# Altium PCB PCB.PcbDoc
Units mil, origin at the board's own origin, x right, y up, seen from the top; angles counter-clockwise.
Board outline 1270 x 865 mil, 2 copper layers (Top Layer, Bottom Layer); 11 components, 8 nets, 28 pads, 109 vias.
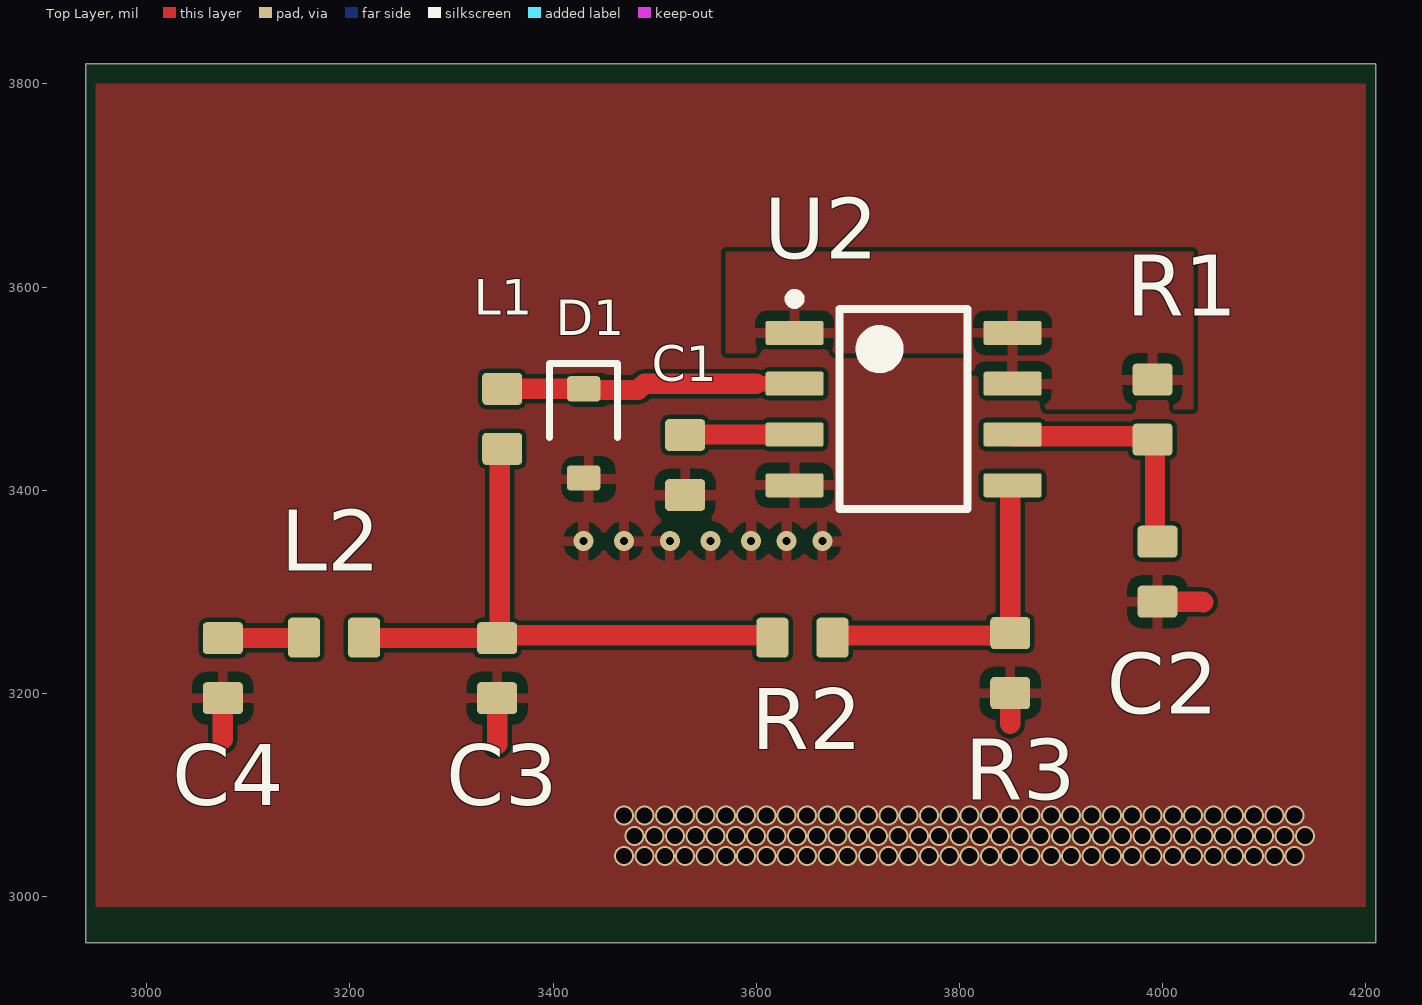
[diagram p0: Top Layer view]
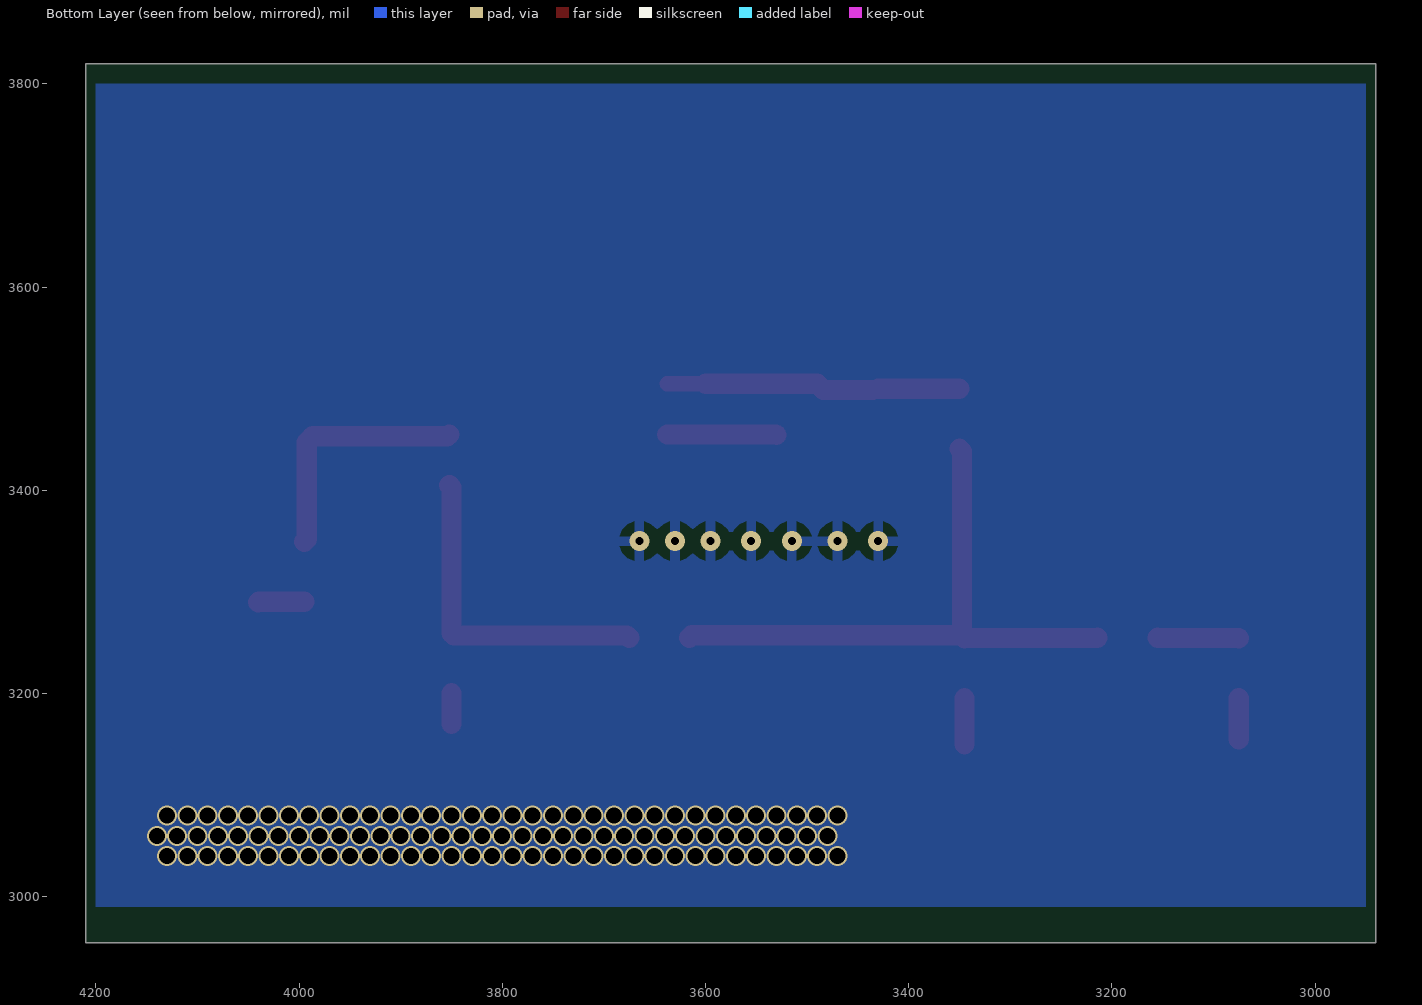
[diagram p1: Bottom Layer view, seen from below]
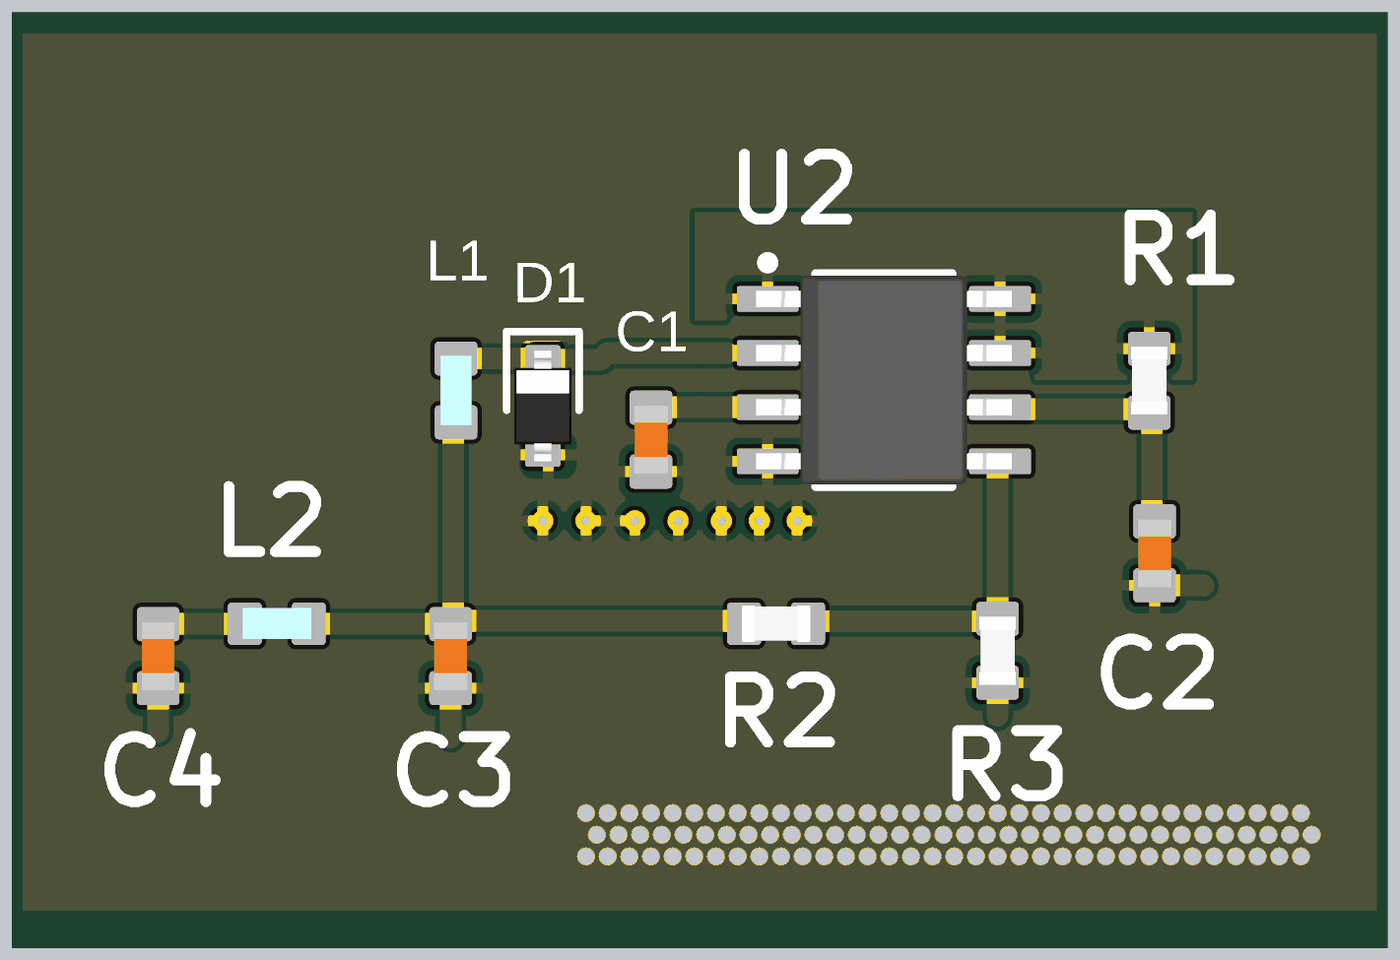
[diagram p2: 3D render of the assembled board from above, using the file's embedded part models]

## Layer stack, top to bottom
Top Solder: solder mask 0.4, Solder Resist, Dk 3.5
Top Layer: signal copper 1.4
Dielectric 1: dielectric 12.6, FR-4, Dk 4.8
Bottom Layer: signal copper 1.4
Bottom Solder: solder mask 0.4, Solder Resist, Dk 3.5

## Board outline
4210,3820 4210,2955 2940,2955 2940,3820 4205,3820

## Design rules (kind name [scope] priority, off if disabled: settings)
Clearance [All] p1: gap=4 ignorepadtopadclearanceinfootprint=FALSE
PolygonConnect [All] p1: connectstyle=Relief reliefconductorwidth=10 reliefentries=4 polygonreliefangle="90 Angle" airgapwidth=10
RoutingVias [All] p1: holewidth=15.75 width=19.68 viastyle="Through Hole" minholewidth=11.81 minwidth=19.68 maxholewidth=248.03 maxwidth=248.03
SolderMaskExpansion [All] p1: expansion=4 istentingtop=FALSE
SupplyNets "Schematic Supply Nets_1" [InNet('+5V')] p1: voltage=0.000
SupplyNets "Schematic Supply Nets" [InNet('GND')] p2: voltage=0.000
Width [All] p1: maxlimit=59.06 minlimit=4 preferedwidth=5
30 further rules are at their usual default settings.

## Classes and differential pairs
component class Filter: C4 L2
component class ExampleCircuit: C1 C2 C3 D1 L1 R1 R2 R3 U2

## Components (designator, comment, footprint, x,y, rotation, side; value= is the part's Value field where it differs from the comment)
C1 "C0603" CAP_0603 3530,3425 r90 top
C2 "C0603" CAP_0603 3995,3320 r90 top
C3 "2.2uF" CAP_0603 3345,3225 r270 top
C4 "2.2uF" CAP_0603 3075,3225 r270 top
D1 "1N4787" SOD-323 3430.16,3456.1 r90 top
L1 "200uH" IND_0603 3350,3470.47 r270 top
L2 "100mH" IND_0603 3184.53,3255 r180 top
R1 "R0603" RES_0603 3990,3479.53 r270 top
R2 "10kR" RES_0603 3645.47,3255 r0 top
R3 "3R3K" RES_0603 3850,3230 r270 top
U2 "MC33063AD" D0008A_N 3745,3480 r0 top

## Footprints (in the part's own frame and the unit in brackets; to place one, negate y for a bottom-side part, rotate by r counter-clockwise, add the part's x,y. Pads: shape width x height; smd on the part's side, far side on the other; paste and mask are expansions set on the pad)
CAP_0603 [mm]
  rrect25% 0.8x1 smd: 1(-0.75,0) 2(0.75,0)
  body extent -0.8,-0.4 0.8,0.4, height 0.51
D0008A_N [mm] "SOIC, 8-Leads, Body 5x4mm, Pitch 1.27mm, IPC Medium Density"
  rrect17% 1.45x0.6 smd: 1(-2.725,1.905) 2(-2.725,0.635) 3(-2.725,-0.635) 4(-2.725,-1.905) 5(2.725,-1.905) 6(2.725,-0.635) 7(2.725,0.635) 8(2.725,1.905)
  silkscreen extent -2.85,-2.5 1.6,2.88, body extent -3,-2.45 3,2.45, height 1.63
IND_0603 [mm]
  rrect25% 0.8x1 smd: 1(-0.75,0) 2(0.75,0)
  body extent -0.81,-0.37 0.81,0.37, height 0.87
RES_0603 [mm]
  rrect25% 0.8x1 smd: 1(-0.75,0) 2(0.75,0)
  body extent -0.8,-0.43 0.8,0.43, height 0.52
SOD-323 [mm]
  rrect25% 0.63x0.83 smd: A(-1.115,0) K(1.115,0)
  silkscreen extent -0.1,-0.85 1.75,0.85, body extent -1.3,-0.68 1.3,0.68, height 1.1

## Part data
C1 C2 C3 C4: library part CAP_0603, "Capacitor SMD 0603"
D1: library part D_ZENER_SOD_323, "Diode Zener SMD SOD-323"
L1 L2: library part IND_0603, "Inductor SMD 0603"
R1 R2 R3: library part RES_0603, "Resistor SMD 0603"
U2: library part CMP-0323-00189-3, "Inverting Buck-Boost Regulator with 3 to 40 V Input and 1.25 to 40 V Output, -40 to 85 degC, 8-Pin SOIC (D), Green (RoHS & no Sb/Br)", Manufacturer="Texas Instruments", Rating=Catalog, Switch Current Limit(Typ)(A)=1.5, Code_JEDEC=MS-012AA, ComponentLink1Description=Datasheet, ComponentLink1URL=http://www.ti.com/general/docs/lit/getliterature.tsp?genericPartNumber=MC33063A&fileType=pdf, ComponentLink2Description="Package Specification", ComponentLink2URL=http://www.ti.com/litv/pdf/msoi002j, ComponentLink3Description="URL Link1", ComponentLink3URL="Samples URL:http://www.ti.com/product/mc33063a#samples", DatasheetVersion=SLLS636M, Eco-Plan="Green (RoHS & no Sb/Br)", Iout(Max)(A)=0.75, Mounting Technology="Surface Mount", PackageDescription="8-Pin Plastic Small Outline Integrated Circuit, 4.9 x 3.9 mm, Pitch 1.27 mm Pitch", PackageReference=D0008A, PackageVersion="revM, Jun-2011", PartNumber=MC33063AD, Regulated Outputs(#)=1, SubFamily="Step-Down Regulator", Topology="Inverting Buck-Boost", Vin(Max)(V)=40, Vin(Min)(V)=3, Vout(Max)(V)=40, Vout(Min)(V)=1.25

## Via types
v1: diameter 19.68, hole 15.75, Top Layer to Bottom Layer, 102 vias
v2: diameter 19.68, hole 7.87, Top Layer to Bottom Layer, 7 vias

## Nets (pads, with @x,y where several pads share a name; then routed paths per layer and width w, separated by ;. In a path a pad name is that pad's centre, name@x,y a point inside that pad or via, vN(x,y) a via of type N, cw(c..) or ccw(c..) an arc to the next point about the centre after c; other vN are vias at no path point)
+5V: C2.2 R1.2 U2.6 | length 242.3
  Top Layer w20: U2.6 3854.09,3453.19 3986.81,3453.19 R1.2 3992.5,3447.5 3992.5,3352.03 C2.2
COMP: R2.2 R3.1 U2.5 | length 323.6
  Top Layer w20: R2.2 3677.26,3257.26 3847.74,3257.26 R3.1 3850,3403.19 3851.81,3405 U2.5
DRC_IPK_SWC: R1.1 U2.1 U2.7 U2.8
GND: C1.1 C2.1 C3.2 C4.2 D1.A R3.2 U2.4 | length 161.6
  Top Layer w20: 3075,3155 C4.2 ; 3345,3150 C3.2 ; 3850,3170 R3.2 ; C2.1 4039.53,3290.47 4040,3290
  other v1: 3470,3040 3490,3040 3510,3040 3530,3040 3550,3040 3570,3040 3590,3040 3610,3040 3630,3040 3650,3040 3670,3040 3690,3040 3710,3040 3730,3040 3750,3040 3770,3040 3790,3040 3810,3040 3830,3040 3850,3040 3870,3040 3890,3040 3910,3040 3930,3040 3950,3040 3970,3040 3990,3040 4010,3040 4030,3040 4050,3040 4070,3040 4090,3040 4110,3040 4130,3040 3480,3060 3500,3060 3520,3060 3540,3060 3560,3060 3580,3060 3600,3060 3620,3060 3640,3060 3660,3060 3680,3060 3700,3060 3720,3060 3740,3060 3760,3060 3780,3060 3800,3060 3820,3060 3840,3060 3860,3060 3880,3060 3900,3060 3920,3060 3940,3060 3960,3060 3980,3060 4000,3060 4020,3060 4040,3060 4060,3060 4080,3060 4100,3060 4120,3060 4140,3060 3470,3080 3490,3080 3510,3080 3530,3080 3550,3080 3570,3080 3590,3080 3610,3080 3630,3080 3650,3080 3670,3080 3690,3080 3710,3080 3730,3080 3750,3080 3770,3080 3790,3080 3810,3080 3830,3080 3850,3080 3870,3080 3890,3080 3910,3080 3930,3080 3950,3080 3970,3080 3990,3080 4010,3080 4030,3080 4050,3080 4070,3080 4090,3080 4110,3080 4130,3080
  other v2: 3430,3350 3470,3350 3515,3350 3555,3350 3595,3350 3630,3350 3665,3350
NetD1_K: D1.K L1.1 U2.2 | length 285.4
  Top Layer w15: 3600,3505 U2.2
  Top Layer w20: L1.1 D1.K ; D1.K@3435,3498.9 3483.9,3498.9 3490,3505 3600,3505
TCAP: C1.2 U2.3 | length 107.9
  Top Layer w20: C1.2 3530.47,3455 U2.3
Vo: C4.1 L2.2 | length 80.2
  Top Layer w20: C4.1 3075.24,3254.76 3154.76,3254.76 L2.2
Vout: C3.1 L1.2 L2.1 R2.1 | length 589.1
  Top Layer w20: L2.1 3214.29,3254.76 3344.76,3254.76 C3.1 3347.5,3257.03 3347.5,3438.44 L1.2 ; C3.1@3347.5,3257.5 3613.44,3257.5 R2.1

## Polygon pours and split planes (outlines as drawn)
GND on Top Layer "GND_L01_P003" (solid, pour order 3): 2950,3800 2950,2990 4200,2990 4200,3800
DRC_IPK_SWC on Top Layer "DRC_POUR" (solid, pour order 0): 3570,3635 3570,3535 3810,3535 3810,3480 4030,3480 4030,3635
GND on Top Layer "GND_L01_P001" (solid, pour order 1): 3410,3430 3410,3335 3705,3335 3705,3430
GND on Bottom Layer "GND" (solid, pour order 2): 3025,3800 4200,3800 4200,2990 2950,2990 2950,3800